# Allegro board Scheda mandrino.brd
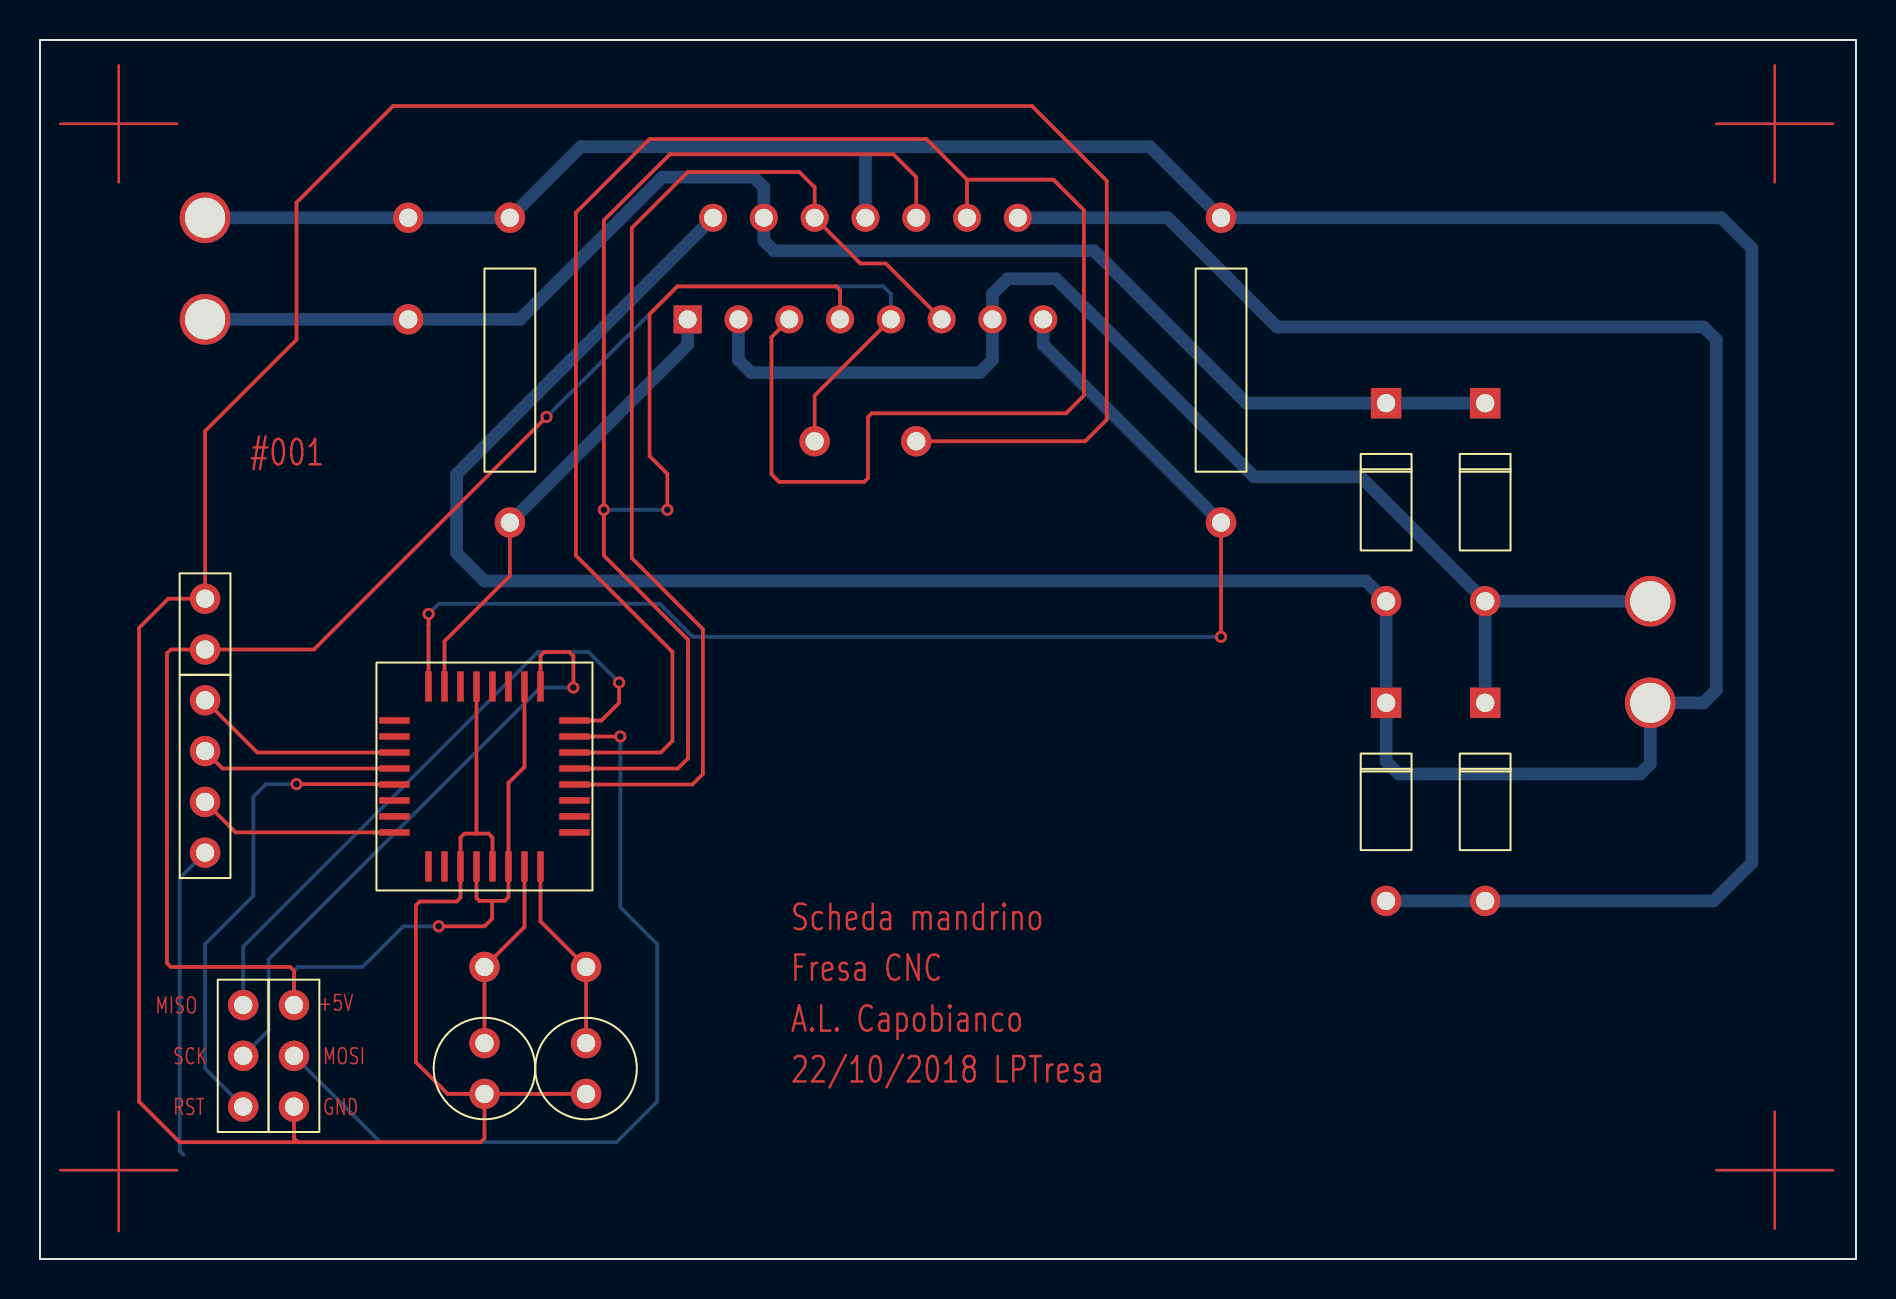
[diagram p0: board, top side]
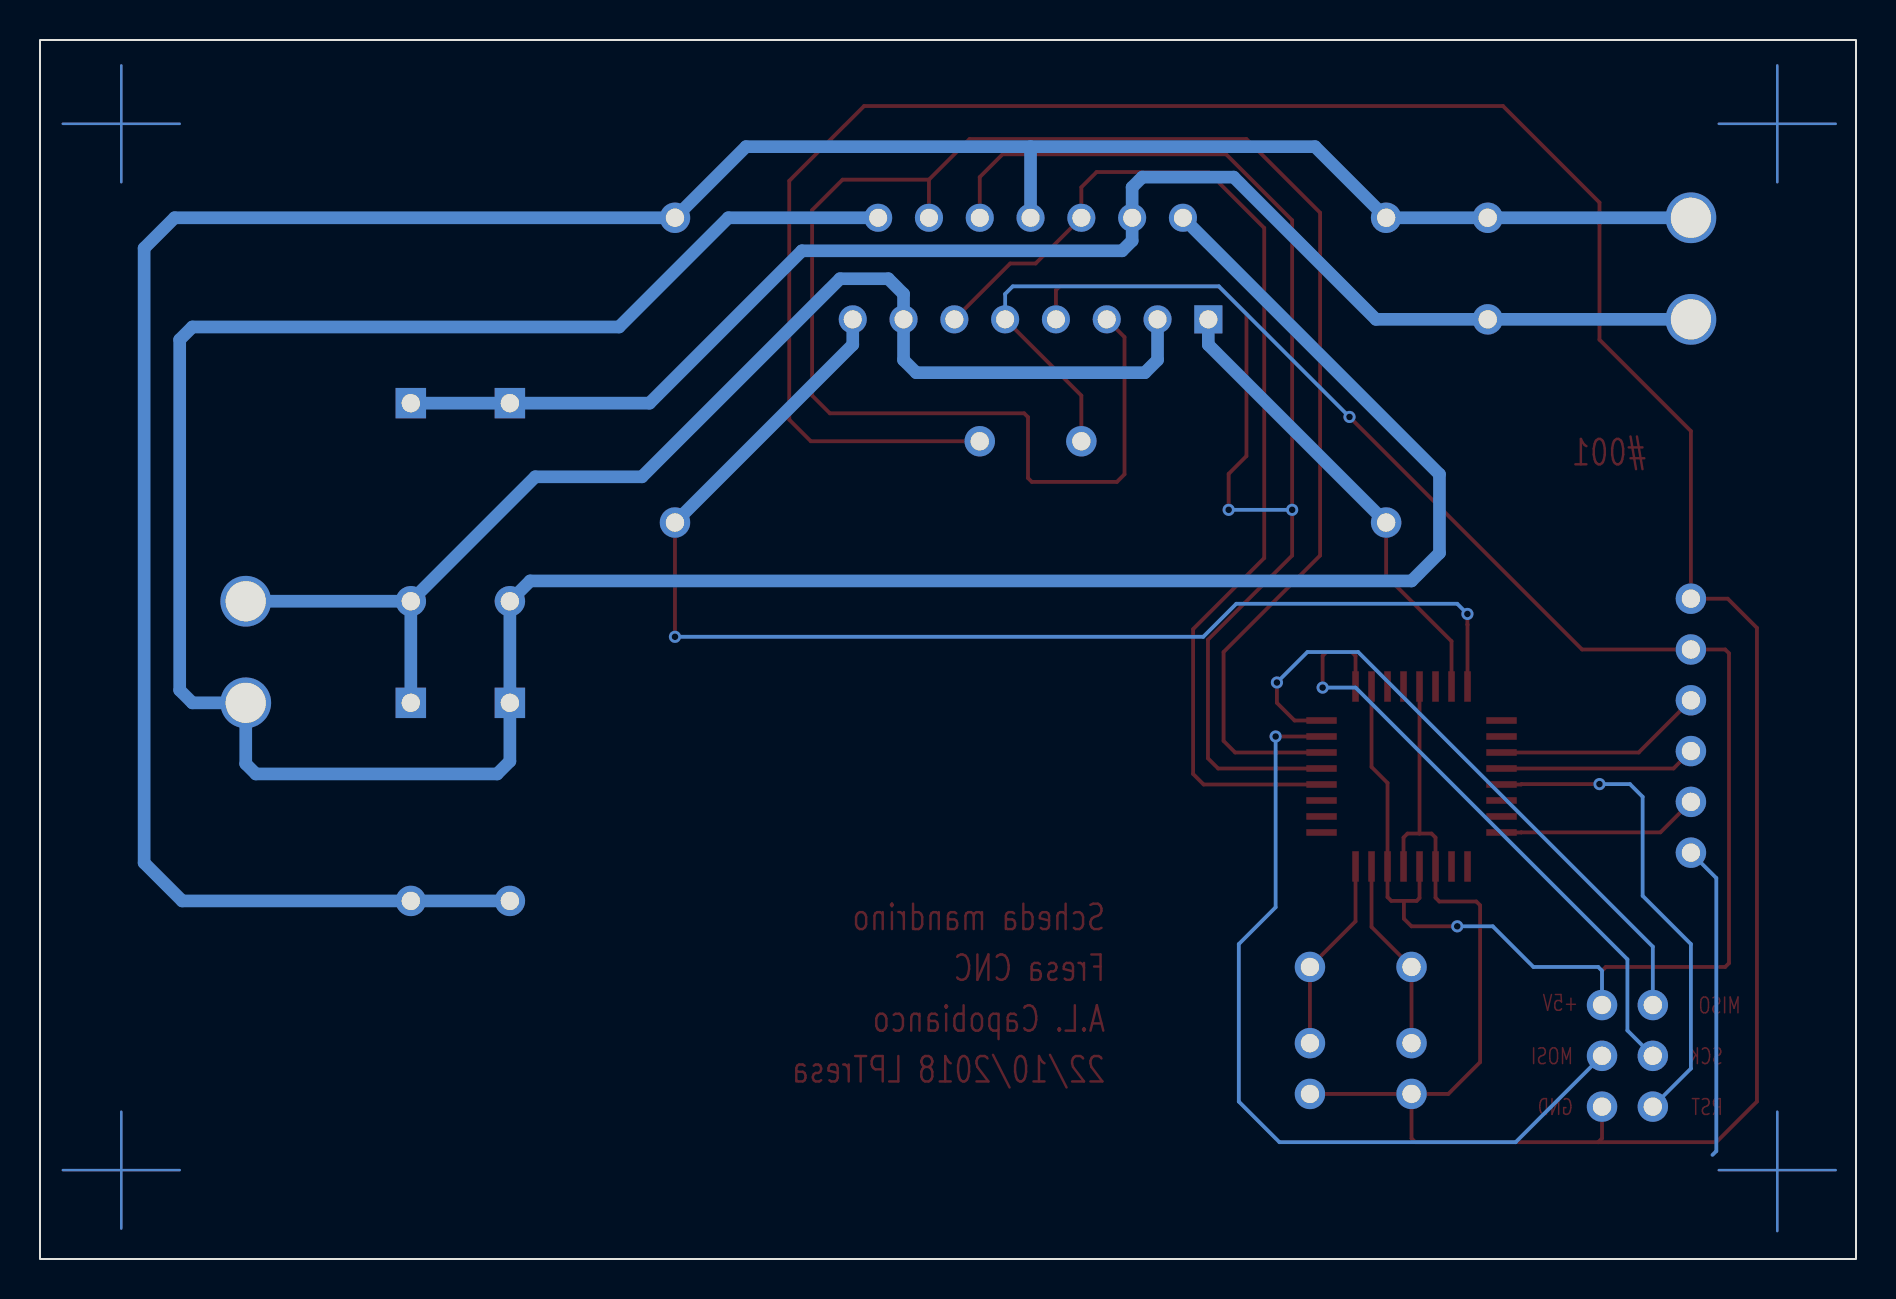
[diagram p1: board, bottom side, seen from below]

Outline 90.81 x 60.96 mm; copper layers: TOP, BOTTOM. Coordinates in mm from the lower left corner of the outline.
Outline path: rectangle 0,0 90.81,60.96

## Design rules (mm)
nets with their own width: min track width 0.191; nets +5V +24V CHOP REF EMERGENZA GND GND_EARTH MISO MOSI N20205 N20209 N20213 N20497 N20501 N21193 N21197 RESET S1 S2 SCK SCL SDA

## Placement (name value [footprint] x y rotation side)
C1  18pF  [CAP196]  22.22 8.25 0 top
C2  18pF  [CAP196]  27.31 8.25 0 top
C3  100nF  [CAP200RET]  38.74 40.89 0 top
C4  100nF  [CAP200RET]  18.41 52.07 270 top
D3  1N5822  [DO41]  67.31 42.8 180 top
D4  1N5822  [DO41]  72.26 42.8 180 top
D7  1N5822  [DO41]  67.31 27.81 180 top
D8  1N5822  [DO41]  72.26 27.81 180 top
J2  ALIM  [JUMPER2]  8.25 30.48 90 top
J3  POTENZA  [HEADER2]  8.25 46.99 90 top
J4  AVR ISP  [JUMPER3]  10.16 12.7 270 top
J5  CON3  [JUMPER3]  12.7 12.7 270 top
J6  CON2  [HEADER2]  80.52 27.81 90 top
J9  SIGIN  [JUMPER4]  8.25 27.94 270 top
R1  0.5  [RES600]  23.5 49.53 0 top
R2  0.5  [RES600]  59.06 49.53 0 top
U1  ATMega328 TQFP  [TQFP32]  22.22 24.13 90 top
U3  L298  [DRIVER_L298N]  41.27 49.53 0 bottom
Y1  16MHz  [CAP200RET]  22.22 14.61 0 top

## Library data of the parts
C1 C2 = CAP NP: Tolerance: ***; User Part Number: ***
C3 C4 = CAP NP_0: Tolerance: ***; User Part Number: ***
D3 D4 D7 D8 = DIODE
J2 = CON2: User Part Number: ***
J3 = CON2
J4 J5 = CON3: User Part Number: ***
J6 = CON2_0
J9 = CON4: User Part Number: ***
R1 R2 = RESISTOR: Tolerance: ***; User Part Number: ***
U1 = ATMega328 TQFP
U3 = L298
Y1 = CRYSTAL: Tolerance: ***; User Part Number: ***

## Footprints (pads in the part's own frame, mm; a bottom-side part is the same pattern mirrored in y, then rotated)
CAP196
  round 1.524 hole 0.914: 1(0,0) 2(0,2.54)
CAP200RET
  round 1.524 hole 0.914: 1(0,0) 2(5.08,0)
DO41
  rect 1.524x1.524 hole 0.914: 1(0,0)
  round 1.524 hole 0.914: 2(0,9.906)
DRIVER_L298N
  rect 1.408x1.408 hole 0.9: 1(-8.89,2.54)
  round 1.408 hole 0.9: 2(-7.62,-2.54) 3(-6.35,2.54) 4(-5.08,-2.54) 5(-3.81,2.54) 6(-2.54,-2.54) 7(-1.27,2.54) 8(0,-2.54) 9(1.27,2.54) 10(2.54,-2.54) 11(3.81,2.54) 12(5.08,-2.54) 13(6.35,2.54) 14(7.62,-2.54) 15(8.89,2.54)
HEADER2
  round 2.54 hole 2.007: 1(0,0) 2(5.08,0)
JUMPER2
  round 1.524 hole 0.914: 1(0,0) 2(2.54,0)
JUMPER3
  round 1.524 hole 0.914: 1(0,0) 2(2.54,0) 3(5.08,0)
JUMPER4
  round 1.524 hole 0.914: 1(0,0) 2(2.54,0) 3(5.08,0) 4(7.62,0)
RES600
  round 1.524 hole 0.914: 1(0,-12.7) 2(0,2.54)
TQFP32
  rect 1.524x0.33 smd: 1(-4.5,2.8) 2(-4.5,2) 3(-4.5,1.2) 4(-4.5,0.4) 5(-4.5,-0.4) 6(-4.5,-1.2) 7(-4.5,-2) 8(-4.5,-2.8) 17(4.5,-2.8) 18(4.5,-2) 19(4.5,-1.2) 20(4.5,-0.4) 21(4.5,0.4) 22(4.5,1.2) 23(4.5,2) 24(4.5,2.8)
  rect 0.33x1.524 smd: 9(-2.8,-4.5) 10(-2,-4.5) 11(-1.2,-4.5) 12(-0.4,-4.5) 13(0.4,-4.5) 14(1.2,-4.5) 15(2,-4.5) 16(2.8,-4.5) 25(2.8,4.5) 26(2,4.5) 27(1.2,4.5) 28(0.4,4.5) 29(-0.4,4.5) 30(-1.2,4.5) 31(-2,4.5) 32(-2.8,4.5)

## Nets
+5V: C3.1 J2.1 J5.1 U1.4(VCC#4) U1.6(VCC#6) U1.18(VCC#18) U3.9(V+ (TTL))
+24V: C4.2 D3.1(K) D4.1(K) J3.1 U3.4(V+)
GND: C1.1 C2.1 C3.2 J2.2 J5.3 U1.3(GND#3) U1.5(GND#5) U1.21(GND#21)
GND_EARTH: C4.1 D7.2(A) D8.2(A) J3.2 R1.2 R2.2 U3.8(GND)
CHOP REF: J9.4
EMERGENZA: J9.3 U1.32(D2)
MISO: J4.1 U1.16(D12)
MOSI: J5.2 U1.15(D11 PWM)
RESET: J4.3 U1.29(RESET)
S1: R1.1 U1.23(A0) U3.1(SENSE A)
S2: R2.1 U1.24(A1) U3.15(SENSE B)
SCK: J4.2 U1.17(D13)
SCL: J9.2 U1.28(A5)
SDA: J9.1 U1.27(A4)
N20205: U1.14(D10 PWM) U3.5(IN 1) U3.12(IN 4)
N20209: U1.12(D8) U3.6(EN A) U3.11(EN B)
N20213: U1.13(D9 PWM) U3.7(IN 2) U3.10(IN 3)
N20497: D3.2(A) D7.1(K) J6.1 U3.2(OUT 1) U3.14(OUT 4)
N20501: D4.2(A) D8.1(K) J6.2 U3.3(OUT 2) U3.13(OUT 3)
N21193: C1.2 U1.7(OSC1) Y1.1
N21197: C2.2 U1.8(OSC2) Y1.2

Pads without a net: U1 1 2 9 10 11 19 20 22 25 26 30 31

## Via types
v1: diameter 0.61, hole 0.33, TOP to BOTTOM, 10 vias

## Routing (per net, layer and track width the routed paths; a pad name or vN(x,y) marks a point on that pad's centre or on a via; arc(x,y) is an arc through that point)
+5V: length 104.4
  TOP w0.191: 22.61,17.91 21.97,17.91 21.82,18.05 U1.4 ; 22.61,17.91 23.23,17.91 23.42,18.1 U1.6 23.42,23.81 24.22,24.61 U1.18 ; 22.61,17.91 22.61,17.02 22.22,16.64 v1(19.94,16.64) ; U3.9 38.74,43.18 C3.1 ; J5.1 12.7,14.41 12.51,14.61 6.54,14.61 6.35,14.8 6.35,30.29 6.54,30.48 J2.1 13.7,30.48 v1(25.33,42.11)
  BOTTOM w0.191: v1(25.33,42.11) 31.86,48.64 42.16,48.64 42.54,48.26 U3.9 ; J5.1 12.7,14.41 12.89,14.61 16.13,14.61 18.16,16.64 v1(19.94,16.64)
+24V: length 73.2
  BOTTOM w0.635: D4.1 D3.1 60.32,42.8 52.7,50.42 36.7,50.42 36.19,50.92 U3.4 36.19,53.59 35.69,54.1 31.12,54.1 24,46.99 C4.2 J3.1
GND: length 170.5
  TOP w0.191: 12.89,5.84 12.7,6.03 J5.3 ; 12.89,5.84 22.03,5.84 22.22,6.03 C1.1 ; 12.89,5.84 6.99,5.84 4.95,7.87 4.95,31.56 6.41,33.02 J2.2 8.25,41.4 12.83,45.97 12.83,52.83 17.65,57.66 49.6,57.66 53.34,53.92 53.34,41.97 52.26,40.89 C3.2 ; U1.5 22.63,21.08 22.42,21.28 21.82,21.28 ; C1.1 C2.1 ; C1.1 20.38,8.25 18.8,9.84 18.8,17.69 18.99,17.88 20.83,17.88 21.03,18.07 U1.3 21.03,21.08 21.23,21.28 21.82,21.28 ; 21.82,21.28 U1.21
GND_EARTH: length 134.3
  BOTTOM w0.635: J3.2 C4.1 R1.2 27.05,55.63 41.27,55.63 ; D7.2 D8.2 83.69,17.91 85.6,19.81 85.6,50.55 84.07,52.07 R2.2 55.5,55.63 41.27,55.63 ; 41.27,55.63 U3.8
CHOP REF: length 15.7
  BOTTOM w0.191: J9.4 6.99,19.05 6.99,5.4 7.18,5.21
EMERGENZA: length 10.1
  TOP w0.191: J9.3 9.78,21.34 16.73,21.34 16.74,21.33 U1.32
MISO: length 32.1
  TOP w0.191: U1.16 28.07,26.93 28.96,27.81 v1(28.96,28.83)
  BOTTOM w0.191: v1(28.96,28.83) 27.43,30.35 24.89,30.35 10.16,15.62 J4.1
MOSI: length 42.1
  TOP w0.191: v1(29.02,26.13) U1.15
  BOTTOM w0.191: v1(29.02,26.13) 29.02,17.59 30.86,15.75 30.86,7.87 28.83,5.84 17.02,5.84 J5.2
RESET: length 24.6
  TOP w0.191: v1(12.83,23.75) 16.72,23.75 16.74,23.73 U1.29
  BOTTOM w0.191: J4.3 8.25,9.53 8.25,15.75 10.67,18.16 10.67,23.11 11.3,23.75 v1(12.83,23.75)
S1: length 23.4
  TOP w0.191: R1.1 23.5,34.16 20.23,30.89 U1.23
  BOTTOM w0.635: U3.1 32.38,45.72 R1.1
S2: length 63.7
  TOP w0.191: R2.1 v1(59.06,31.12) ; v1(19.43,32.26) 19.43,31.73 19.42,31.72 U1.24
  BOTTOM w0.191: v1(19.43,32.26) 19.94,32.77 30.99,32.77 32.64,31.12 v1(59.06,31.12)
  BOTTOM w0.635: U3.15 50.16,45.72 R2.1
SCK: length 31.1
  TOP w0.191: v1(26.67,28.57) 26.67,30.16 26.48,30.35 25.22,30.35 25.03,30.16 U1.17
  BOTTOM w0.191: J4.2 11.43,11.43 11.43,14.99 25.02,28.57 v1(26.67,28.57)
SCL: length 9.8
  TOP w0.191: U1.28 9.12,24.53 J9.2
SDA: length 10.6
  TOP w0.191: J9.1 10.87,25.33 U1.27
N20205: length 100.6
  TOP w0.191: 46.35,53.98 50.67,53.98 52.2,52.45 52.2,43.18 51.31,42.29 41.59,42.29 41.4,42.1 41.4,39.05 41.21,38.86 36.96,38.86 36.58,39.24 36.58,46.1 U3.5 ; 46.35,53.98 U3.12 ; 46.35,53.98 44.32,56.01 30.48,56.01 26.8,52.32 26.8,35.18 31.62,30.35 31.62,25.91 31.04,25.33 U1.14
N20209: length 56
  TOP w0.191: U1.12 32.62,23.73 33.15,24.26 33.15,31.5 29.59,35.05 29.59,51.56 32.38,54.36 37.97,54.36 38.74,53.59 U3.6 41.02,49.78 42.29,49.78 U3.11
N20213: length 79
  TOP w0.191: U1.13 31.9,24.53 32.4,25.04 32.4,30.97 28.19,35.18 v1(28.19,37.47) 28.19,51.94 31.5,55.25 42.67,55.25 43.81,54.1 U3.10 ; v1(31.37,37.47) 31.37,39.26 30.48,40.15 30.48,47.24 31.88,48.64 39.81,48.64 40,48.45 U3.7
  BOTTOM w0.191: v1(31.37,37.47) v1(28.19,37.47)
N20497: length 152.8
  BOTTOM w0.635: U3.2 20.83,39.24 20.83,35.31 22.22,33.91 66.29,33.91 D3.2 D7.1 67.31,24.89 67.94,24.26 80.01,24.26 80.52,24.77 J6.1 83.19,27.81 83.82,28.45 83.82,45.97 83.19,46.61 61.85,46.61 56.39,52.07 U3.14
N20501: length 63.5
  BOTTOM w0.635: D8.1 D4.2 ; D4.2 80.52,32.89 ; D4.2 66.04,39.12 60.71,39.12 50.8,49.02 48.39,49.02 47.62,48.26 U3.13 47.62,44.96 46.99,44.32 35.56,44.32 34.93,44.96 U3.3
N21193: length 9.7
  TOP w0.191: C1.2 Y1.1 24.22,16.6 U1.7
N21197: length 9.8
  TOP w0.191: U1.8 25.03,16.88 Y1.2 C2.2

## Text on the board
TOP: MISO | SCK | RST | +5V | MOSI | GND | #001 | Scheda mandrino | Fresa CNC | A.L. Capobianco | 22/10/2018 LPTresa
